# EAGLE board display (EAGLE 9.5.2)
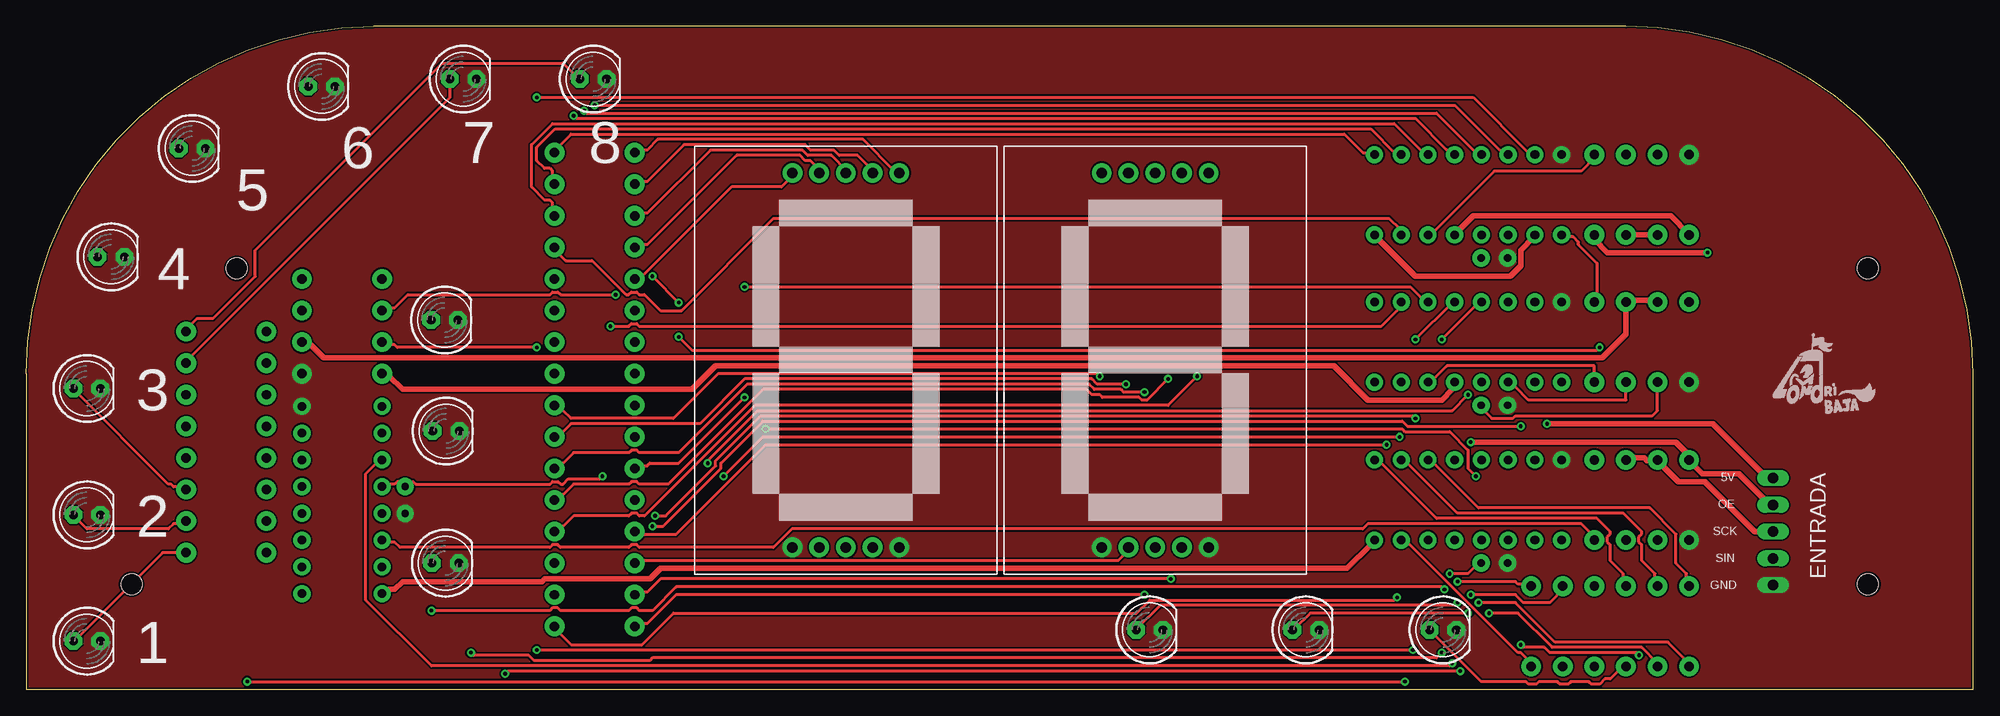
[diagram p0: board, top side]
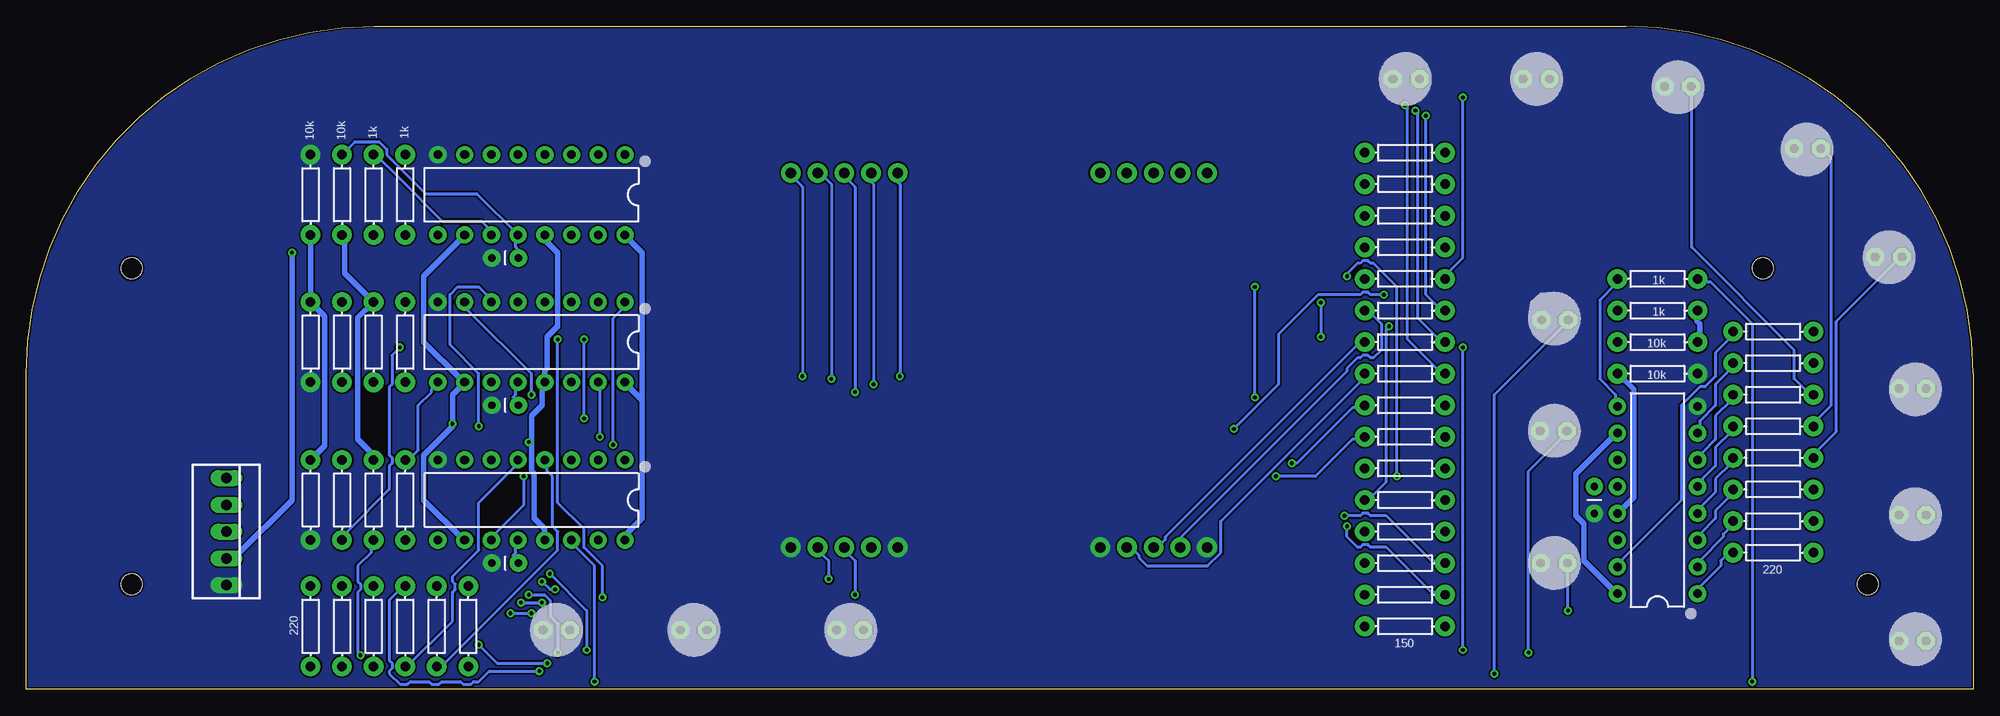
[diagram p1: board, bottom side, seen from below]

Size 185 x 63 mm. Coordinates in mm from the lower left corner, seen from the top.
Outline: 0,0 185,0 185,30 arc90 152,63 33,63 arc90 0,30 0,0
Copper layers (1*16): Top 0.035mm / dielectric 1.5mm / Bottom 0.035mm
Design rules "default *": minimum track width 6mil, minimum drill 0.35mm, track to track 6mil, track to pad 6mil, pad to pad 6mil, via to via 6mil, smd to smd 6mil, copper to edge 0.2mm, drill to drill 6mil, minimum pad ring 10mil, minimum via ring 8mil, stop-mask expansion 4mil, vias tented up to drill 0mil, thermal gap 10mil
Net classes: 0 default: width 0.3 mm; 1 5v: width 0.5 mm
Holes 2 mm at 10,10 20,40 175,10 175,40

## Footprints (pad centres in the part's own frame; a part is rotated, then mirrored left to right if it is on the bottom)
CAP-PTH-2.54 = drill 0.7 pad 1.651: 1 -1.27,0; 2 1.27,0
LED5MM = drill 0.813 pad 1.676 octagon: A -1.27,0; K 1.27,0
AXIAL-0.3 = drill 0.9 pad 1.88: P$1 -3.81,0; P$2 3.81,0
DIP16 = drill 0.813 pad 1.626: 1 -8.89,-3.81; 2 -6.35,-3.81; 3 -3.81,-3.81; 4 -1.27,-3.81; 5 1.27,-3.81; 6 3.81,-3.81; 7 6.35,-3.81; 8 8.89,-3.81; 9 8.89,3.81; 10 6.35,3.81; 11 3.81,3.81; 12 1.27,3.81; 13 -1.27,3.81; 14 -3.81,3.81; 15 -6.35,3.81; 16 -8.89,3.81
1.2INCH = drill 1 pad 1.88: 1 -5.08,-17.78; 2 -2.54,-17.78; 3 0,-17.78; 4 2.54,-17.78; 5 5.08,-17.78; 6 5.08,17.78; 7 2.54,17.78; 8 0,17.78; 9 -2.54,17.78; 10 -5.08,17.78
22-23-2051 = drill 1 long: 1 -5.08,0; 2 -2.54,0; 3 0,0; 4 2.54,0; 5 5.08,0

## Placement (x,y rotation side)
C1  0.1uF  [CAP-PTH-2.54]  139.5,41 180 bottom
C2  0.1uF  [CAP-PTH-2.54]  139.5,27 180 bottom
C3  0.1uF  [CAP-PTH-2.54]  36,18 270 bottom
C4  0.1uF  [CAP-PTH-2.54]  139.5,12 180 bottom
LED1  [LED5MM]  5.76,4.59 0 top
LED2  [LED5MM]  5.76,16.59 0 top
LED3  [LED5MM]  5.76,28.59 0 top
LED4  [LED5MM]  8.05,41.1 0 top
LED5  [LED5MM]  15.76,51.4 0 top
LED6  [LED5MM]  28.06,57.29 0 top
LED7  [LED5MM]  41.51,57.99 0 top
LED8  [LED5MM]  53.87,57.99 0 top
LED9  [LED5MM]  134.62,5.66 0 top
LED10  [LED5MM]  121.58,5.66 0 top
LED11  [LED5MM]  106.74,5.66 0 top
LED12  [LED5MM]  39.82,12 0 top
LED13  [LED5MM]  39.88,24.55 0 top
LED14  [LED5MM]  39.74,35.1 0 top
R1  1k  [AXIAL-0.3]  152,47 270 bottom
R2  1k  [AXIAL-0.3]  149,33 90 bottom
R3  10k  [AXIAL-0.3]  155,47 90 bottom
R4  10k  [AXIAL-0.3]  158,47 270 bottom
R5  150  [AXIAL-0.3]  54,18 0 bottom
R6  150  [AXIAL-0.3]  54,15 0 bottom
R7  150  [AXIAL-0.3]  54,9 180 bottom
R8  150  [AXIAL-0.3]  54,6 180 bottom
R9  150  [AXIAL-0.3]  54,21 0 bottom
R10  150  [AXIAL-0.3]  54,27 0 bottom
R11  150  [AXIAL-0.3]  54,24 0 bottom
R12  150  [AXIAL-0.3]  54,12 180 bottom
R13  150  [AXIAL-0.3]  54,48 180 bottom
R14  220  [AXIAL-0.3]  19,16 0 bottom
R15  150  [AXIAL-0.3]  54,51 180 bottom
R16  150  [AXIAL-0.3]  54,30 180 bottom
R17  150  [AXIAL-0.3]  54,33 180 bottom
R18  150  [AXIAL-0.3]  54,45 180 bottom
R19  150  [AXIAL-0.3]  54,39 180 bottom
R20  1k  [AXIAL-0.3]  149,47 270 bottom
R21  1k  [AXIAL-0.3]  152,33 90 bottom
R22  1k  [AXIAL-0.3]  149,18 90 bottom
R23  1k  [AXIAL-0.3]  30,39 180 bottom
R24  10k  [AXIAL-0.3]  155,33 270 bottom
R25  10k  [AXIAL-0.3]  158,33 90 bottom
R26  150  [AXIAL-0.3]  54,42 180 bottom
R27  1k  [AXIAL-0.3]  30,36 0 bottom
R28  1k  [AXIAL-0.3]  152,18 90 bottom
R29  10k  [AXIAL-0.3]  155,18 270 bottom
R30  10k  [AXIAL-0.3]  30,33 180 bottom
R31  10k  [AXIAL-0.3]  158,18 90 bottom
R32  10k  [AXIAL-0.3]  30,30 180 bottom
R33  150  [AXIAL-0.3]  54,36 180 bottom
R34  220  [AXIAL-0.3]  19,13 0 bottom
R35  220  [AXIAL-0.3]  19,28 0 bottom
R36  220  [AXIAL-0.3]  19,25 0 bottom
R37  220  [AXIAL-0.3]  19,22 0 bottom
R38  220  [AXIAL-0.3]  19,34 0 bottom
R39  220  [AXIAL-0.3]  19,31 0 bottom
R40  220  [AXIAL-0.3]  19,19 0 bottom
R41  220  [AXIAL-0.3]  149,6 90 bottom
R42  220  [AXIAL-0.3]  152,6 270 bottom
R43  220  [AXIAL-0.3]  155,6 270 bottom
R44  220  [AXIAL-0.3]  146,6 90 bottom
R45  220  [AXIAL-0.3]  143,6 90 bottom
R46  220  [AXIAL-0.3]  158,6 270 bottom
U1  SN74HC595N  [DIP16]  137,47 180 bottom
U2  SN74HC595N  [DIP16]  137,33 180 bottom
U3  SN74HC595N  [DIP16]  30,18 90 bottom
U4  SN74HC595N  [DIP16]  137,18 180 bottom
U$1  DISPLAY1.2  [1.2INCH]  77.88,31.29 0 top
U$2  DISPLAY1.2  [1.2INCH]  107.27,31.29 0 top
X3  22-23-2051  [22-23-2051]  166,15 270 bottom

## Library data of the parts
C1-C4 = SparkFun-Capacitors; PROD_ID: CAP-09128
LED1-LED14 = adafruit
R1 R2 R20-R23 R27 R28 = SparkFun-Resistors; PROD_ID: RES-08380
R3-R19 R24-R26 R29-R46 = SparkFun-Resistors; PROD_ID: RES-09435
U1-U4 = SparkFun-IC-Logic; PROD_ID: IC-13123
U$1 U$2 = displays-vigs
X3 = con-molex; MF: MOLEX; MPN: 22-23-2051; OC_FARNELL: 1462952; OC_NEWARK: 38C9178

## Nets
5V [5v]: U1.10 U1.16 U2.10 U2.16 U3.10 U3.16 U4.10 U4.16 X3.1
A3: R13.P$2 U$1.7
A4: R5.P$2 U$2.7
B3: R15.P$2 U$1.6
B4: R6.P$2 U$2.6
C3: R16.P$2 U$1.4
C4: R7.P$2 U$2.4
D3: R17.P$2 U$1.3
D4: R8.P$2 U$2.3
DP3: R18.P$2 U$1.8
DP4: R9.P$2 U$2.8
E3: R33.P$2 U$1.2
E4: R12.P$2 U$2.2
F3: R26.P$2 U$1.9
F4: R11.P$2 U$2.9
G3: R19.P$2 U$1.10
G4: R10.P$2 U$2.10
GND: C1.2 C2.2 C3.2 C4.2 LED1.K LED2.K LED3.K LED4.K LED5.K LED6.K LED7.K LED8.K LED9.K LED10.K LED11.K LED12.K LED13.K LED14.K R4.P$1 R25.P$1 R31.P$1 R32.P$1 U1.8 U2.8 U3.8 U4.8 U$1.1 U$1.5 U$2.1 U$2.5 X3.5
N$1: R20.P$1 U1.14
N$2: R1.P$1 U1.11
N$5: C1.1 R3.P$2 U1.12
N$6: R2.P$1 U2.14
N$10: R21.P$1 U2.11
N$18: C2.1 R24.P$2 U2.12
N$32: LED4.A R37.P$2
N$33: LED8.A R38.P$2
N$34: LED7.A R39.P$2
N$35: LED3.A R40.P$2
N$36: LED5.A R36.P$2
N$37: LED6.A R35.P$2
N$38: LED1.A R34.P$2
N$39: LED2.A R14.P$2
N$40: LED10.A R43.P$2
N$41: R22.P$1 U3.14
N$42: R28.P$1 U3.11
N$43: C3.1 R29.P$2 U3.12
N$44: LED9.A R42.P$2
N$45: LED11.A R46.P$2
N$46: LED14.A R41.P$2
N$47: LED12.A R45.P$2
N$52: R23.P$1 U4.14
N$53: R27.P$1 U4.11
N$54: C4.1 R30.P$2 U4.12
N$58: LED13.A R44.P$2
OE [5v]: R4.P$2 R25.P$2 R31.P$2 R32.P$2 U1.13 U2.13 U3.13 U4.13 X3.2
Q0: R26.P$1 U1.15
Q1: R15.P$1 U1.1
Q2: R13.P$1 U1.2
Q3: R18.P$1 U1.3
Q4: R33.P$1 U1.4
Q5: R17.P$1 U1.5
Q6: R16.P$1 U1.6
Q7: R19.P$1 U1.7
R0: R38.P$1 U3.15
R1: R34.P$1 U3.1
R2: R14.P$1 U3.2
R3: R40.P$1 U3.3
R4: R37.P$1 U3.4
R5: R36.P$1 U3.5
R6: R35.P$1 U3.6
R7: R39.P$1 U3.7
SCLK [5v]: R1.P$2 R3.P$1 R21.P$2 R24.P$1 R27.P$2 R28.P$2 R29.P$1 R30.P$1 X3.3
SIN [5v]: R20.P$2 X3.4
SOUT: R2.P$2 U1.9
SOUT1: R22.P$2 U2.9
SOUT2: R23.P$2 U3.9
T0: R45.P$1 U4.15
T1: R42.P$1 U4.1
T2: R43.P$1 U4.2
T3: R46.P$1 U4.3
T4: R44.P$1 U4.4
T5: R41.P$1 U4.5
W0: R11.P$1 U2.15
W1: R6.P$1 U2.1
W2: R5.P$1 U2.2
W3: R9.P$1 U2.3
W4: R12.P$1 U2.4
W5: R8.P$1 U2.5
W6: R7.P$1 U2.6
W7: R10.P$1 U2.7

## Tracks (layer width: path | path; a pad name or v marks a point on that pad's centre or on a via)
5V  (via drill 0.35)
  Top 0.5: v144.5,25.25 160.25,25.25 165,20.5 165.75,20.5 166,20.25 X3.1 | U3.16 34,9.25 34.25,9.25 34.5,9.5 35,9.5 35.75,10.25 49,10.25 49.25,10.5 59.25,10.5 60.25,11.5 125.5,11.5 127.75,13.75 127.75,14 128,14 U4.16 | U1.10 143.25,43 142,41.75 142,40.25 141,39.25 132,39.25 128.5,42.75 128.5,43 128.25,43 U1.16
  Bottom 0.5: U4.10 143.5,14.25 147.25,18 147.25,22.25 144.5,25 v144.5,25.25 144.5,28 143.75,28.75 143.5,28.75 143.5,29 U2.10 143.75,29 143.75,29.5 147.25,33 147.25,39.25 143.5,43 U1.10 | U3.16 34,9.25 37,12.25 37,15.75 37.75,16.5 37.75,20.5 34,24.25 U3.10 | 126.62,27.62 127.75,28.75 128,28.75 128,29 U2.16 | 126.62,27.62 126.5,27.5 126.5,16.25 128,14.75 128,14.25 U4.16 | U1.16 128,43 126.5,41.5 126.5,27.75 126.62,27.62
A3
  Top 0.3: R13.P$2 58,48 58.25,48.25 59,48.25 62.5,51.75 74,51.75 74.5,51.25 76.75,51.25 77.25,50.75 79,50.75 80.5,49.25 U$1.7
A4  (via drill 0.35)
  Top 0.3: v108.5,29.5 106.5,27.5 106,27.5 105.75,27.75 102.25,27.75 102,28 101.25,28 100.75,28.5 70,28.5 61,19.5 58.25,19.5 58,19.75 57.5,19.75 57.25,19.5 52,19.5 51,18.5 50.75,18.5 50.25,18 R5.P$2
  Bottom 0.3: v108.5,29.5 108.5,48 109.75,49.25 U$2.7
B3
  Top 0.3: R15.P$2 58,51 58.25,51.25 59,51.25 60,52.25 79.5,52.25 82.5,49.25 82.75,49.25 U$1.6
B4  (via drill 0.35)
  Top 0.3: v111.25,29.75 108.5,27 69.25,27 58.75,16.5 58.25,16.5 58,16.75 57.5,16.75 57.25,16.5 52,16.5 51,15.5 50.75,15.5 50.25,15 R6.P$2
  Bottom 0.3: v111.25,29.75 111.25,47.75 112.25,48.75 112.25,49 U$2.6
C3
  Bottom 0.3: R16.P$2 58,30 58.25,29.75 58.25,29.25 71.5,16 71.5,13 72.75,11.75 78.5,11.75 79.25,12.5 79.25,12.75 80.25,13.75 U$1.4
C4  (via drill 0.35)
  Top 0.3: v108.75,10.5 60.25,10.5 59,9.25 58.25,9.25 58,9 R7.P$2
  Bottom 0.3: v108.75,10.5 108.75,12.25 109.75,13.25 109.75,13.5 U$2.4
D3
  Bottom 0.3: R17.P$2 58.5,33 58.5,32.75 76.75,14.5 76.75,14.25 77.25,13.75 77.75,13.75 U$1.3
D4  (via drill 0.35)
  Top 0.3: v106.25,9 61.75,9 59,6.25 58.25,6.25 58,6 R8.P$2
  Bottom 0.3: v106.25,9 106.25,12.25 107.25,13.25 107.25,13.5 U$2.3
DP3
  Top 0.3: R18.P$2 58,45 58.25,45.25 59,45.25 65,51.25 73.75,51.25 74.25,50.75 76.5,50.75 78,49.25 U$1.8
DP4  (via drill 0.35)
  Top 0.3: v106.25,28.25 104.25,28.25 104,28.5 101.5,28.5 101,29 68.5,29 62,22.5 58.25,22.5 58,22.75 57.5,22.75 57.25,22.5 52,22.5 51,21.5 50.75,21.5 50.25,21 R9.P$2
  Bottom 0.3: v106.25,28.25 106.25,47.75 107.25,48.75 107.25,49 U$2.8
E3
  Bottom 0.3: R33.P$2 57.5,36 56.25,34.75 56.25,32.25 57,31.5 57.25,31.5 57.5,31.75 58,31.75 58.25,31.5 58.5,31.5 59.5,30.5 59.5,30.25 75.25,14.5 75.25,13.75 U$1.2
E4
  Top 0.3: R12.P$2 58,12 58.25,12.25 103.75,12.25 104.5,13 104.5,13.5 U$2.2
F3
  Top 0.3: R26.P$2 58,42 58.25,42.25 59,42.25 67.5,50.75 73.5,50.75 74,50.25 74.5,50.25 75.5,49.25 U$1.9
F4  (via drill 0.35)
  Top 0.3: v104.5,29 101.75,29 101.25,29.5 68.25,29.5 64,25.25 51.75,25.25 51,24.5 50.75,24.5 50.25,24 R11.P$2
  Bottom 0.3: v104.5,29 104.5,48 104.75,48.25 104.75,49 U$2.9
G3
  Top 0.3: R19.P$2 58,39 58.25,39.25 58.5,39.25 67,47.75 71.75,47.75 73,49 U$1.10
G4  (via drill 0.35)
  Top 0.3: v102,29.75 101.75,30 65.75,30 61.5,25.75 51.75,25.75 51,26.5 50.75,26.5 50.25,27 R10.P$2
  Bottom 0.3: v102,29.75 102,48 102.25,48.25 102.25,49 U$2.10
GND
  pour Top (no thermals): 0,0 0,30 arc-90 33,63 152,63 arc-90 185,30 185,0
  pour Bottom (rank 6, no thermals): 0,0 0,30 arc-90 33,63 152,63 arc-90 185,30 185,0
N$1
  Top 0.3: U1.14 133.5,43.5 133.75,43.5 139.5,49.25 147.75,49.25 149,50.5 R20.P$1
N$2
  Bottom 0.3: U1.11 141,43.25 141,43.75 141.75,44.5 145.5,44.5 149.5,48.5 151.81,50.81 R1.P$1
N$5
  Bottom 0.3: U1.12 138.5,43 138.5,42 138.25,41.75 138.25,41.25 138.25,41 C1.1 | 138.5,43.25 U1.12 | R3.P$2 153.76,52.05 151.49,52.05 150.76,51.33 150.76,50.81 147.06,47.12 142.19,47.12 U1.12
N$6
  Top 0.3: U2.14 133.5,29.5 133.75,29.5 135,30.75 149,30.75 R2.P$1
N$10
  Top 0.3: U2.11 141.25,28.75 141.5,28.75 142.75,27.5 152,27.5 R21.P$1
N$18
  Top 0.3: R24.P$2 155,26.5 154.5,26 141.5,26 141.25,25.75 139.25,25.75 138,27 C2.1
  Bottom 0.3: U2.12 138.5,29 138.5,28 138.75,27.75 138.25,27.25 138.25,27 C2.1
N$32
  Bottom 0.3: LED4.A 7,41 13,35 13,24.5 15,22.5 15,22 R37.P$2
N$33
  Top 0.3: LED8.A 52.5,58 51,59.5 39.5,59.5 21.75,41.75 21.75,39.25 17.75,35.25 16.25,35.25 15,34 R38.P$2
N$34
  Top 0.3: LED7.A 40.25,57.75 40.25,56.25 15,31 R39.P$2
N$35
  Top 0.3: R40.P$2 14.5,19 14.25,19.25 14,19.25 13.75,19.5 13.5,19.5 4.5,28.5 LED3.A
N$36
  Bottom 0.3: LED5.A 14.25,51.25 13.5,50.5 13.5,27 15,25.5 15,25 R36.P$2
N$37
  Bottom 0.3: R35.P$2 15.5,28 17,29.5 17,32.25 26.75,42 26.75,57.25 LED6.A
N$38
  Top 0.3: R34.P$2 12.94,13 4.53,4.59 LED1.A
N$39
  Top 0.3: LED2.A 4.5,16.5 5.75,15.25 13.5,15.25 14,15.75 14.75,15.75 15,16 R14.P$2
N$40  (via drill 0.35)
  Top 0.3: v137,7.25 122,7.25 120.5,5.75 LED10.A | v139,7.25 141.75,7.25 145,4 153.5,4 155,2.5 R43.P$2
  Bottom 0.3: v139,7.25 v137,7.25
N$41
  Top 0.3: R22.P$1 149,14.5 147.75,15.75 127.5,15.75 127,15.25 72.75,15.25 71,13.5 58.25,13.5 58,13.75 57.5,13.75 57.25,13.5 50.75,13.5 50.5,13.75 50,13.75 49.75,13.5 35.5,13.5 35,14 34,14 U3.14
N$42  (via drill 0.35)
  Top 0.3: U3.11 33.5,21.5 33.25,21.5 32.25,20.5 32.25,8.5 38.5,2.25 135.25,2.25 v135.5,2.5 | v142,4.25 142.25,4 144.25,4 144.75,3.5 153,3.5 v153.25,3.25
  Bottom 0.3: v135.5,2.5 140.25,2.5 v142,4.25 | v153.25,3.25 153.5,3.5 153.5,9.25 153.25,9.5 153.25,10 153.5,10.25 153.5,11.75 152.25,13 152.25,13.25 152,13.5 R28.P$1
N$43  (via drill 0.35)
  Top 0.3: 35.75,19.75 35.25,19.75 35,19.5 34,19.5 U3.12 | 35.75,19.75 36,19.5 C3.1 35.75,19.75 | v149.5,32.5 149.25,32.25 63.25,32.25 v62,33.5 | v59.5,39.25 v62,36.75 | v54.75,20.25 54.5,20 51.5,20 51,19.5 50.75,19.5 50.5,19.75 50,19.75 49.75,19.5 37,19.5 36.75,19.75 35.75,19.75
  Bottom 0.3: v149.5,32.5 150.25,31.75 150.25,29 150.5,28.75 150.5,22.25 150.25,22 150.25,21.5 150.5,21.25 150.5,19 154.5,15 154.5,14.75 155,14.25 R29.P$2 | v62,36.75 v62,33.5 | v59.5,39.25 59.5,39.5 58.5,40.5 58.25,40.5 58,40.75 57.5,40.75 57.25,40.5 57,40.5 54.75,38.25 v54.75,20.25
N$44
  Top 0.3: LED9.A 133.5,5.5 138.25,0.75 142.5,0.75 142.75,0.5 143.5,0.5 143.75,0.75 145.5,0.75 145.75,0.5 146.5,0.5 146.75,0.75 148.5,0.75 148.75,0.5 149.5,0.5 150,1 150.5,1 151.5,2 152,2 R42.P$2
N$45  (via drill 0.35)
  Top 0.3: v136,8.25 135.75,8 107.75,8 105.5,5.75 LED11.A | v138,8.25 141.5,8.25 145.25,4.5 156,4.5 158,2.5 R46.P$2
  Bottom 0.3: v138,8.25 v136,8.25
N$46  (via drill 0.35)
  Top 0.3: v45.5,1.5 45.75,1.75 v136.25,1.75
  Bottom 0.3: v45.5,1.5 45.5,28 38.5,35 LED14.A | v136.25,1.75 141,1.75 142,0.75 142.5,0.75 142.75,0.5 143.5,0.5 143.75,0.75 145.5,0.75 145.75,0.5 146.5,0.5 146.75,0.75 148.5,0.75 148.75,0.5 149.5,0.5 150.5,1.5 150.5,1.75 150.25,2 150.25,2.5 150.5,2.75 150.5,8.5 149,10 R41.P$2
N$47  (via drill 0.35)
  Top 0.3: v38.5,7.5 49.75,7.5 50,7.75 50.5,7.75 50.75,7.5 57.25,7.5 57.5,7.75 58,7.75 58.25,7.5 59.5,7.5 61.75,9.75 134.5,9.75 v134.75,9.5 | v136,10.25 141.5,10.25 141.75,10 143,10 R45.P$2
  Bottom 0.3: v38.5,7.5 38.5,12 LED12.A | v134.75,9.5 135.25,9.5 v136,10.25
N$52  (via drill 0.35)
  Top 0.3: v21,0.75 v131,0.75
  Bottom 0.3: U4.14 132.75,13.75 132.75,13.5 131,11.75 v131,0.75 | v21,0.75 21,34.75 25,38.75 26,38.75 26,39 R23.P$1
N$53  (via drill 0.35)
  Top 0.3: v137.75,20.25 137,21 137,22.75 135.25,24.5 131,24.5 130.75,24.75 v70.25,24.75 | v56,37.5 50.75,37.5 50.5,37.75 50,37.75 49.75,37.5 36.25,37.5 35,36.25 34.75,36.25 34.5,36 R27.P$1
  Bottom 0.3: U4.11 140.5,14.5 140.5,14.75 137.75,17.5 v137.75,20.25 | v70.25,24.75 66,29 66,33.75 62.25,37.5 58.25,37.5 58,37.75 57.5,37.75 57.25,37.5 v56,37.5
N$54  (via drill 0.35)
  Top 0.3: v48.5,32.5 35.25,32.5 35,32.75 34.25,32.75 34,33 R30.P$2 | v131.75,3.75 v48.5,3.75 | v135.25,11 137,11 138,12 C4.1
  Bottom 0.3: U4.12 138.5,14 138.5,13 138.75,12.75 138.25,12.25 138.25,12 C4.1 | v48.5,3.75 v48.5,32.5 | v131.75,3.75 131.75,7.5 v135.25,11
N$58  (via drill 0.35)
  Top 0.3: v42.25,3.5 42.5,3.25 47.75,3.25 48.25,2.75 59.25,2.75 59.5,3 134,3 v134.5,3.5 | v137.25,9 141.5,9 142.25,8.25 144.75,8.25 146,9.5 R44.P$2
  Bottom 0.3: v42.25,3.5 42.25,20.75 39,24 39,24.25 38.75,24.5 LED13.A | v134.5,3.5 134.5,6.25 135.25,7 135.25,8.5 135.75,9 v137.25,9
OE  (via drill 0.35)
  Top 0.5: R4.P$2 158,43.25 156.25,45 137.5,45 135.75,43.25 U1.13 | X3.2 166,17.75 165.75,18 165.25,18 162.75,20.5 159.25,20.5 158,21.75 R31.P$2 158,22.25 156.75,23.5 v137.25,23.5 | R32.P$2 34,30 34.25,29.75 34.5,29.75 35.75,28.5 63.25,28.5 65.5,30.75 124.25,30.75 127.5,27.5 134.5,27.5 135.5,28.5 135.5,29 U2.13
  Bottom 0.5: U3.13 33.75,16.75 32.25,18.25 32.25,28.5 33.75,30 R32.P$2 | 137,23.5 137,26 136,27 136,28.75 135.75,29 U2.13 135.75,29.25 135.75,30.25 135.5,30.5 135.5,33.5 134.5,34.5 134.5,41.5 135.5,42.5 135.5,43 U1.13 | 137,23.5 137,20.75 136.75,20.5 136.75,16.25 135.75,15.25 135.75,14.25 U4.13 | 137,23.5 v137.25,23.5 | R4.P$2 R25.P$2 156.66,35.47 156.66,23.15 R31.P$2
Q0
  Top 0.3: U1.15 130.5,43.25 130.5,43.75 129.5,44.75 71,44.75 62.25,36 60.25,36 58.75,37.5 58.25,37.5 58,37.75 57.5,37.75 57.25,37.5 57,37.5 53.75,40.75 51.25,40.75 50,42 R26.P$1
Q1
  Top 0.3: U1.1 128,51 127,51 125.25,52.75 51.75,52.75 50,51 R15.P$1
Q2
  Top 0.3: U1.2 130.5,51 130,51 127.75,53.25 50.25,53.25 48.5,51.5 48.5,50.25 49.25,49.5 49.75,49.5 50,49.25 50,48 R13.P$1
Q3
  Top 0.3: U1.3 132.75,51.25 132.5,51.25 130,53.75 50,53.75 48,51.75 48,47.75 49.25,46.5 49.75,46.5 50,46.25 50,45 R18.P$1
Q4  (via drill 0.35)
  Top 0.3: v52,54.5 52.25,54.25 132,54.25 135,51.25 135.25,51.25 135.5,51 U1.4
  Bottom 0.3: v52,54.5 52,37.5 50.5,36 R33.P$1
Q5  (via drill 0.35)
  Top 0.3: v53,55 53.25,54.75 134,54.75 137.75,51 138.25,51 U1.5
  Bottom 0.3: v53,55 52.75,54.75 52.75,35.25 50.5,33 R17.P$1
Q6  (via drill 0.35)
  Top 0.3: v54,55.5 135.75,55.5 140.25,51 140.75,51 U1.6
  Bottom 0.3: v54,55.5 53.75,55.25 53.75,33.25 50.5,30 R16.P$1
Q7  (via drill 0.35)
  Top 0.3: v48.5,56.25 137.5,56.25 142.75,51 143.25,51 U1.7
  Bottom 0.3: v48.5,56.25 48.5,41 50,39.5 50,39 R19.P$1
R0
  Bottom 0.3: U3.15 33.75,11.75 33.5,12 33.5,12.25 27.75,18 27.75,27 26,28.75 25.5,28.75 24.5,29.75 24.5,32 23,33.5 23,34 R38.P$1
R1
  Bottom 0.3: R34.P$1 23.25,13 24,12.25 24,11.75 26,9.75 26,9.25 U3.1
R2
  Bottom 0.3: U3.2 26,11.75 26,12.25 23.75,14.5 23.75,14.75 23,15.5 23,16 R14.P$1
R3
  Bottom 0.3: U3.3 26,14.25 26,14.75 24.5,16.25 24.5,17 23,18.5 23,19 R40.P$1
R4
  Bottom 0.3: U3.4 26,16.75 26,17.25 24.5,18.75 24.5,20 23,21.5 23,22 R37.P$1
R5
  Bottom 0.3: U3.5 26,19.5 25.75,19.75 25.75,20 24.5,21.25 24.5,23 23,24.5 23,25 R36.P$1
R6
  Bottom 0.3: U3.6 25.75,22.25 25.75,22.5 24.5,23.75 24.5,26 23,27.5 23,28 R35.P$1
R7
  Bottom 0.3: U3.7 26,24.5 26,25.5 24.5,27 24.5,29 23,30.5 23,31 R39.P$1
SCLK
  Top 0.5: X3.3 164.25,15 159.5,19.75 157,19.75 155,21.75 | 155,21.75 154,21.75 153.75,22 152,22 R28.P$2 | 155,21.75 R29.P$1 | R1.P$2 R3.P$1 | R24.P$1 155,37 152,37 R21.P$2 152,33.75 149.75,31.5 28.25,31.5 27,32.75 26.5,32.75 26.25,33 R30.P$1
  Bottom 0.5: R30.P$1 26,33 26,34.75 26.25,35 26.25,36 R27.P$2 | R3.P$1 154.75,42.94 154.75,39.56 R21.P$2 153.5,35.31 153.5,23.75 152.25,22.5 152.25,22.25 152,22 R28.P$2
SIN  (via drill 0.35)
  Top 0.5: v159.75,41.5 150.25,41.5 149,42.75 R20.P$2
  Bottom 0.5: v159.75,41.5 159.75,18 165,12.75 165,12.5 166,12.5 X3.4
SOUT
  Top 0.3: U1.9 146,43 147,43 147.5,42.5 147.5,42.25 149.25,40.5 149.25,37.06 R2.P$2
SOUT1
  Bottom 0.3: U2.9 146,29 146.5,28.5 146.5,28.25 147.75,27 147.75,22.75 148.5,22 149,22 R22.P$2
SOUT2
  Bottom 0.3: U3.9 34,27 34,28 35.5,29.5 35.5,37 34,38.5 34,39 R23.P$2
T0
  Top 0.3: R45.P$1 143,2.5 142,3.5 141.75,3.5 131.25,14 130.75,14 U4.15
T1
  Top 0.3: U4.1 128.25,21.75 128.5,21.5 128.75,21.5 134,16.25 149.25,16.25 150.5,15 150.5,14.75 150.25,14.5 150.25,14 150.5,13.75 150.5,12.25 151.75,11 151.75,10 152,10 R42.P$1
T2
  Top 0.3: U4.2 130.75,21.75 131,21.5 131.25,21.5 136,16.75 151.75,16.75 153.5,15 153.5,14.75 153.25,14.5 153.25,14 153.5,13.75 153.5,12.25 154.75,11 154.75,10 155,10 R43.P$1
T3
  Top 0.3: U4.3 133.5,21.5 133.75,21.5 138,17.25 154.25,17.25 156.75,14.75 156.75,12 157.75,11 157.75,10 158,10 R46.P$1
T4
  Bottom 0.3: U4.4 135.5,21.75 135.5,20.75 135,20.25 135,15.5 134.5,15 134.5,13.25 145.5,2.25 146,2.25 R44.P$1
T5
  Bottom 0.3: U4.5 138.5,21.75 138.5,21.25 142,17.75 142,13.25 144.5,10.75 144.5,10.25 144.25,10 144.25,9.5 144.5,9.25 144.5,6.5 149,2 R41.P$1
W0  (via drill 0.35)
  Top 0.3: v130.5,24 70,24 v66.25,20.25
  Bottom 0.3: v130.5,24 130.5,29 U2.15 | v66.25,20.25 62.5,20.25 59,23.75 58,23.75 58,24 R11.P$1
W1  (via drill 0.35)
  Top 0.3: v129.25,23.25 70.25,23.25 61.75,14.75 58.25,14.75 58,15 R6.P$1
  Bottom 0.3: v129.25,23.25 129.25,35.25 128.25,36.25 128.25,36.75 U2.1
W2  (via drill 0.35)
  Top 0.3: v55.5,34.5 57.25,34.5 57.5,34.75 58,34.75 58.25,34.5 128.75,34.5 130.5,36.25 130.5,36.75 U2.2
  Bottom 0.3: v55.5,34.5 55.75,34.25 55.75,19.75 57.5,18 R5.P$1
W3  (via drill 0.35)
  Top 0.3: U2.3 132.75,37.25 132.5,37.25 131.5,38.25 v68.25,38.25 | v68.25,27.75 62,21.5 59.25,21.5 59,21.25 58.75,21.25 58.5,21 R9.P$1
  Bottom 0.3: v68.25,27.75 v68.25,38.25
W4  (via drill 0.35)
  Top 0.3: v132,33.25 135.5,36.75 U2.4 | v132,25.75 131.75,26 69.75,26 65.5,21.75 65.5,21.25 60.75,16.5 v59.75,16.5
  Bottom 0.3: v132,25.75 v132,33.25 | v59.75,16.5 58.25,16.5 58,16.75 57.5,16.75 57.25,16.5 55.75,16.5 51.5,12.25 51.25,12.25 51,12 R12.P$1
W5  (via drill 0.35)
  Top 0.3: v134.5,33.25 137.75,36.5 138,36.5 138.25,36.75 U2.5 | v130.25,8.75 130,8.5 106.75,8.5 105.5,7.25 61.5,7.25 58.5,4.25 51.75,4.25 50,6 R8.P$1
  Bottom 0.3: v134.5,33.25 134.5,17.75 132,15.25 132,13.5 130.25,11.75 v130.25,8.75
W6  (via drill 0.35)
  Top 0.3: v142,25 131.25,25 130.75,25.5 70,25.5 66,21.5 66,21 60.5,15.5 v59.5,15.5
  Bottom 0.3: U2.6 141.25,37.25 141.25,37.5 142,38.25 144,38.25 144.75,37.5 144.75,32.75 142,30 v142,25 | v59.5,15.5 59.5,14.5 58.5,13.5 58.25,13.5 58,13.75 57.5,13.75 57.25,13.5 55.75,13.5 51.5,9.25 51.25,9.25 51,9 R7.P$1
W7  (via drill 0.35)
  Top 0.3: v137,28 135.5,26.5 69.5,26.5 64.75,21.75 v64.75,21.5
  Bottom 0.3: v137,28 137,30 143,36 143,36.5 143.25,36.75 U2.7 | v64.75,21.5 64.25,21.5 59,26.75 58,26.75 58,27 R10.P$1

## Text on the board
tPlace: 6 | 7 | 8 | 5 | 4 | 3 | 5V | OE | 2 | SCK | SIN | GND | ENTRADA | 1
bPlace: 1k | 1k | 10k | 10k | 1k | 1k | 10k | 10k | 220 | 220 | 150